# EAGLE board TeensyGC9307 (EAGLE 9.6.2)
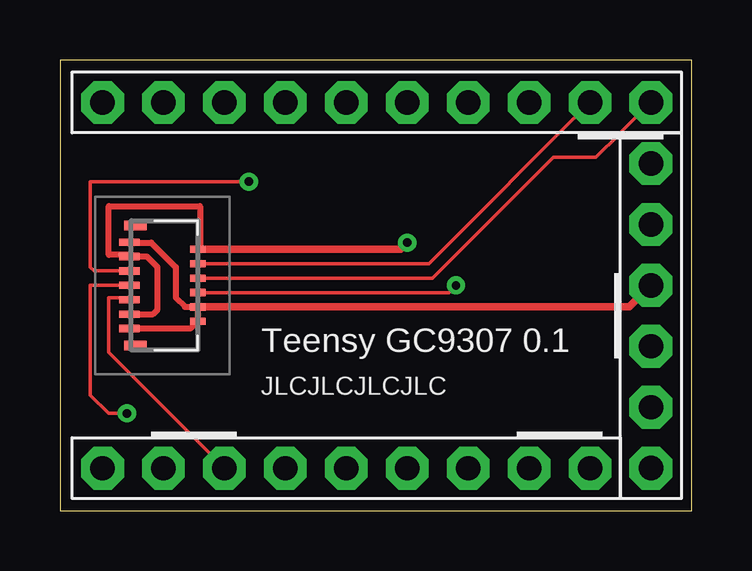
[diagram p0: board, top side]
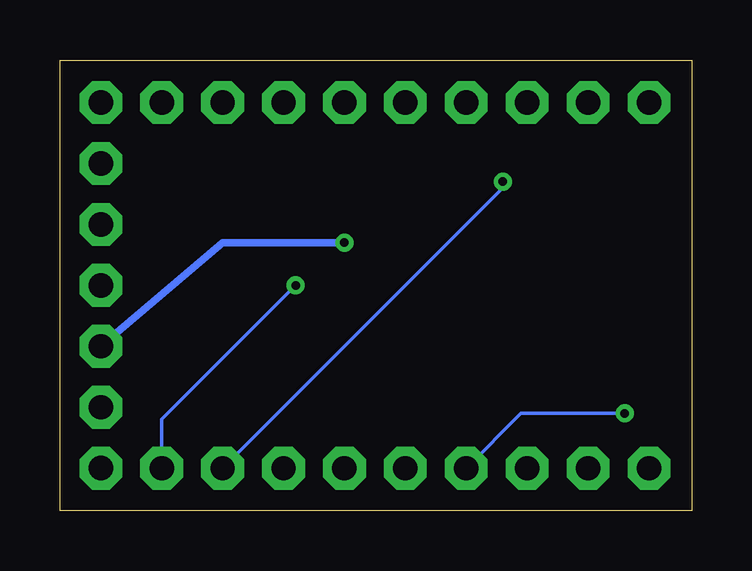
[diagram p1: board, bottom side, seen from below]

Size 26.34 x 18.79 mm. Coordinates in mm from the lower left corner, seen from the top.
Outline: 0,0 26.34,0 26.34,18.79 0,18.79 0,0
Copper layers (1*16): Top 0.035mm / dielectric 1.5mm / Bottom 0.035mm
Design rules "default": minimum track width 6mil, minimum drill 0.35mm, track to track 6mil, track to pad 6mil, pad to pad 6mil, via to via 6mil, smd to smd 6mil, copper to edge 40mil, drill to drill 6mil, minimum pad ring 10mil, minimum via ring 8mil, stop-mask expansion 4mil, vias tented up to drill 0mil, thermal gap 10mil

## Footprints (pad centres in the part's own frame; a part is rotated, then mirrored left to right if it is on the bottom)
123287243 = smd 0.3 x 0.85: 1 -1.8,-1.425; 3 -1.2,-1.425; 5 -0.6,-1.425; 7 0,-1.425; 9 0.6,-1.425; 11 1.2,-1.425; 13 1.8,-1.425 | smd 0.3 x 0.65: 2 -1.5,1.425; 4 -0.9,1.425; 6 -0.3,1.425; 8 0.3,1.425; 10 0.9,1.425; 12 1.5,1.425 | smd 0.4 x 0.95: MP1 -2.5,-1.175; MP2 2.5,-1.175
1X09-BIG = drill 1.016 pad 1.778 octagon: 1 -10.16,0; 2 -7.62,0; 3 -5.08,0; 4 -2.54,0; 5 0,0; 6 2.54,0; 7 5.08,0; 8 7.62,0; 9 10.16,0
1X06-BIG = drill 1.016 pad 1.778 octagon: 1 -6.35,0; 2 -3.81,0; 3 -1.27,0; 4 1.27,0; 5 3.81,0; 6 6.35,0
1X10-BIG = drill 1.016 pad 1.778 octagon: 1 -11.43,0; 2 -8.89,0; 3 -6.35,0; 4 -3.81,0; 5 -1.27,0; 6 1.27,0; 7 3.81,0; 8 6.35,0; 9 8.89,0; 10 11.43,0

## Placement (x,y rotation side)
J1  1-2328724-3  [123287243]  4.32,9.4 270 top
JP1  [1X09-BIG]  11.94,1.78 180 top
JP6  [1X06-BIG]  24.64,8.13 270 top
U$1  PINHD-1X10  [1X10-BIG]  13.21,17.02 180 top

## Library data of the parts
J1 = 1-2328724-3; DESCRIPTION: AMP - TE CONNECTIVITY - 1-2328724-3 - CONNECTOR, FPC, R/A, 13POS, 1ROW, 0.3MM; HEIGHT: 1.1mm; MANUFACTURER_NAME: TE Connectivity; MANUFACTURER_PART_NUMBER: 1-2328724-3; MOUSER_PART_NUMBER: 571-1-2328724-3; MOUSER_PRICE-STOCK: https://www.mouser.co.uk/ProductDetail/TE-Connectivity/1-2328724-3?qs=w%2Fv1CP2dgqo8aBCjMy0R7g%3D%3D
JP1 JP6 U$1 = adafruit

## Nets
N$1: J1.1 J1.10 J1.12 J1.13 JP6.3
N$2: J1.2 J1.3 J1.11 JP6.4
N$3: J1.5 JP1.2
N$4: J1.6 U$1.1
N$5: J1.8 JP1.1
N$6: J1.4 U$1.2
N$7: J1.7 JP1.6
N$8: J1.9 JP1.7

## Tracks (layer width: path | path; a pad name or v marks a point on that pad's centre or on a via)
N$1
  Top 0.152: J1.1 2.91,11.18
  Top 0.254: J1.13 5.44,7.6 J1.12 J1.10 5.22,8.5 4.83,8.89 4.83,10.16 3.81,11.18 2.91,11.18
  Top 0.305: J1.10 23.74,8.5 JP6.3
N$2  (via drill 0.35)
  Top 0.152: J1.3 2.82,10.67 | 5.84,11 J1.2
  Top 0.254: 2.82,10.67 2.03,10.67 2.03,12.7 5.84,12.7 5.84,11 | J1.11 3.88,8.2 4.06,8.38 4.06,10.16 3.63,10.6 J1.3
  Top 0.305: J1.2 14.2,10.9 v14.48,11.18
  Bottom 0.305: v14.48,11.18 19.56,11.18 JP6.4
N$3  (via drill 0.35)
  Top 0.152: J1.5 1.43,10 1.27,10.16 1.27,13.72 v7.87,13.72
  Bottom 0.152: JP1.2 7.87,13.46 v7.87,13.72
N$4
  Top 0.152: U$1.1 23.37,15.75 23.34,15.72 22.35,14.73 20.57,14.73 15.54,9.7 J1.6
N$5  (via drill 0.35)
  Top 0.152: J1.8 16.21,9.1 v16.51,9.4
  Bottom 0.152: v16.51,9.4 22.1,3.81 JP1.1
N$6
  Top 0.152: J1.4 14.99,10.3 15.12,10.3 15.38,10.3 U$1.2
N$7  (via drill 0.35)
  Top 0.152: J1.7 1.27,9.4 1.27,4.83 2.03,4.06 v2.79,4.06
  Bottom 0.152: v2.79,4.06 7.11,4.06 JP1.6
N$8
  Top 0.152: J1.9 2.8,8.89 2.03,8.89 2.03,6.6 JP1.7

## Text on the board
tNames: Teensy GC9307 0.1 | JLCJLCJLCJLC